# Altium PCB BMS_Slave_8S V0.1.PcbDoc (part 2 of 2)
Units mm, origin at the board's own origin, x right, y up, seen from the top; angles counter-clockwise.
Board outline 54 x 106.3 mm, 2 copper layers (Top Layer, Bottom Layer); 166 components, 124 nets, 443 pads, 56 vias.
Unrouted connection lines stored in the file: 225.
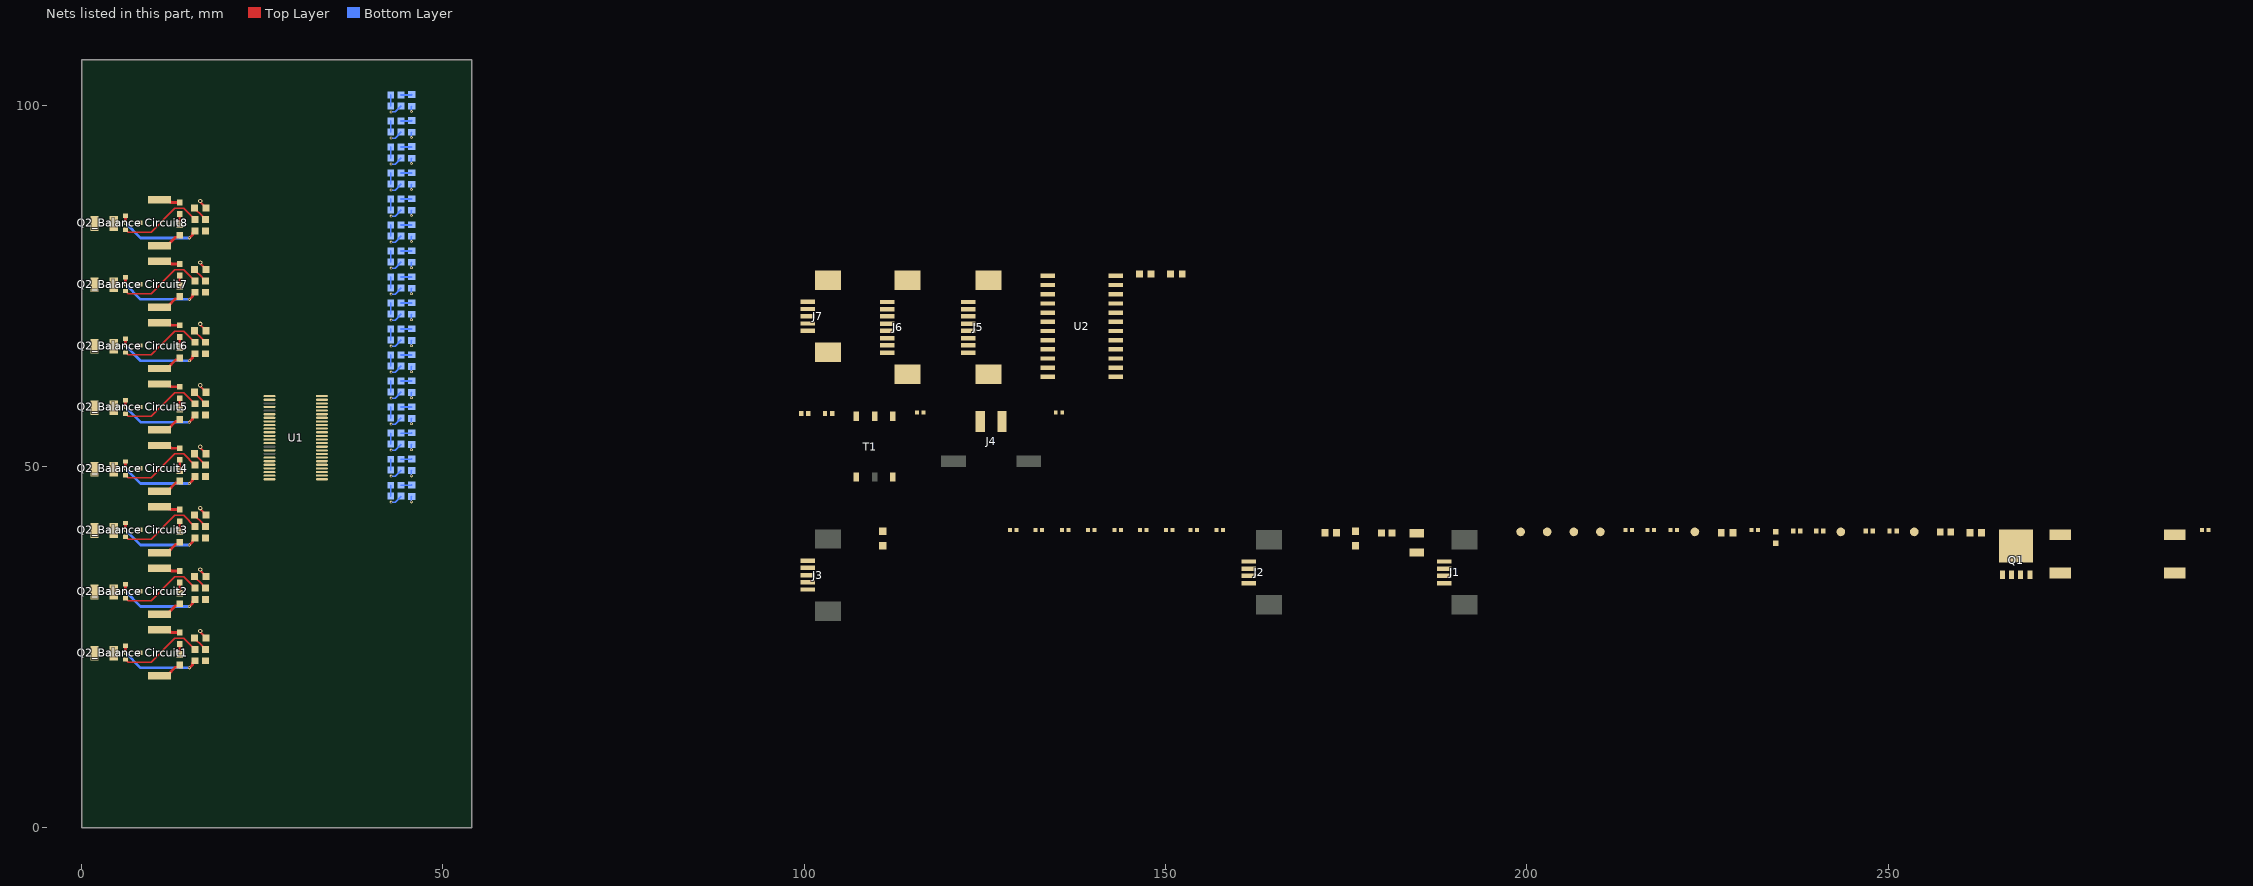
[diagram p2: the nets of this part, all layers, seen from the top]

## Part data
C1 C6: library part Capacitor, "Capacitor", Voltage=>60V, ComponentLink1Description="New link"
C2 C3 C4 C5 C8 C9 C10 C11 "C13_NTC Sense1" "C13_NTC Sense2" "C13_NTC Sense3" "C13_NTC Sense4" "C13_NTC Sense5" "C13_NTC Sense6" "C13_NTC Sense7" "C13_NTC Sense8" "C13_NTC Sense9" "C13_NTC Sense10" "C13_NTC Sense11" "C13_NTC Sense12" "C13_NTC Sense13" "C13_NTC Sense14" "C13_NTC Sense15" "C13_NTC Sense16": library part Capacitor, "Capacitor", ComponentLink1Description="New link"
C7: library part Capacitor, "Capacitor", Voltage=<50.4V, ComponentLink1Description="New link"
"C12_Balance Circuit1" "C12_Balance Circuit2" "C12_Balance Circuit3" "C12_Balance Circuit4" "C12_Balance Circuit5" "C12_Balance Circuit6" "C12_Balance Circuit7" "C12_Balance Circuit8": library part Capacitor, "Capacitor", Voltage=>50.4V, ComponentLink1Description="New link"
D1: "LED RED DIFFUSED 0603 SMD", Case Code (Imperial)=0603, Case Code (Metric)=1608, Color=Red, Forward Voltage=2V, Manufacturer="Wurth Electronics", Supplier Part Number 1=710-150060SS55040, Test Current=20mA, Case/Package=0603, Category=LEDs, Dominant Wavelength=630nm, Height=0.5mm, Length=1.6mm, Lens Size=0.8mm, Lens Style=Flat, Lens Transparency=Diffused, Luminous Intensity=70mcd, Manufacturer Part Number=150060SS55040, Mount="Surface Mount", Packaging="Tape and Reel", Pricing 1="1=0.18000, 10=0.16800, 50=0.16800, 100=0.15200, 1000=0.12100, 10000=0.10600 (USD)", RoHS=No, RoHS Compliant=No, Stock 1=17006, Supplier 1=Mouser, Viewing Angle=140°, Width=0.8mm
"D2_Balance Circuit1" "D2_Balance Circuit2" "D2_Balance Circuit3" "D2_Balance Circuit4" "D2_Balance Circuit5" "D2_Balance Circuit6" "D2_Balance Circuit7" "D2_Balance Circuit8": "LED BLUE DIFFUSED 0603 SMD", Case/Package=0603, Color=Blue, Forward Voltage=3.2V, Manufacturer="Wurth Electronics", Supplier Part Number 1=710-150060BS55040, Test Current=20mA, ComponentLink1Description=http://www.farnell.com/datasheets/2621640.pdf?src-supplier=Farnell, ComponentLink1URL=http://www.farnell.com/datasheets/2621640.pdf?src-supplier=Farnell, ComponentLink2Description=https://www.we-online.de/web/en/index.php/download/media/07_electronic_components/download_center_1/application_notes_berichte/ano002_leds___the_future_of_horticultural_lighting/ANO002b_EN_LEDs_The_Future_of_Horticultural_Lighting.pdf?src-supplier=Digi-Key, ComponentLink2URL=https://www.we-online.de/web/en/index.php/download/media/07_electronic_components/download_center_1/application_notes_berichte/ano002_leds___the_future_of_horticultural_lighting/ANO002b_EN_LEDs_The_Future_of_Horticultural_Lighting.pdf?src-supplier=Digi-Key, ComponentLink3Description=https://katalog.we-online.de/pbs/datasheet/150060BS55040.pdf?src-supplier=Digi-Key, ComponentLink3URL=https://katalog.we-online.de/pbs/datasheet/150060BS55040.pdf?src-supplier=Digi-Key, ComponentLink4Description=http://www.farnell.com/datasheets/2621640.pdf?src-supplier=Newark, ComponentLink4URL=http://www.farnell.com/datasheets/2621640.pdf?src-supplier=Newark, Dominant Wavelength=470nm, Height=0.5mm, Length=1.6mm, Lens Size=0.8mm, Lens Style=Flat, Lens Transparency=Diffused, Luminous Intensity=80mcd, Manufacturer Part Number=150060BS55040, Mount="Surface Mount", Packaging="Tape and Reel", Pricing 1="1=0.18000, 10=0.16800, 50=0.16800, 100=0.15200, 1000=0.12100, 10000=0.10600 (USD)", RoHS=No, RoHS Compliant=No, Supplier 1=Mouser, Viewing Angle=140°, Width=0.8mm
F1 "F2_Balance Circuit1" "F2_Balance Circuit2" "F2_Balance Circuit3" "F2_Balance Circuit4" "F2_Balance Circuit5" "F2_Balance Circuit6" "F2_Balance Circuit7" "F2_Balance Circuit8": library part "Fuse 2", "LITTELFUSE - 0466.500NR - Fuse, Surface Mount, 500 mA, 466 Series, 63 VAC, 63 VDC, Very Fast Acting, 1206", Case Code (Imperial)=1206, Case Code (Metric)=3216, Current Rating=500mA, DC Cold Resistance=248mR, Manufacturer=Littelfuse, Max Operating Temperature=90°C, Min Operating Temperature=-55°C, Package Quantity=5000, Resistance=350mR, Supplier Part Number 1=576-0466.500NR, Voltage Rating=63V, Approvals=UL,CSA, Body Material=Thermoplastic, Case/Package=1206, Category=Fuses, ComponentLink1Description=https://datasheet.ciiva.com/17081/0466-500nr-17081083.pdf?src-supplier=Allied+Electronics, ComponentLink1URL=https://datasheet.ciiva.com/17081/0466-500nr-17081083.pdf?src-supplier=Allied+Electronics, ComponentLink2Description=https://datasheet.ciiva.com/16327/littelfuse-fuse-466-16327478.pdf?src-supplier=Future+Electronics, ComponentLink2URL=https://datasheet.ciiva.com/16327/littelfuse-fuse-466-16327478.pdf?src-supplier=Future+Electronics, ComponentLink3Description=https://datasheet.ciiva.com/299/466seriesdrawing-299207.pdf?src-supplier=Digi-Key, ComponentLink3URL=https://datasheet.ciiva.com/299/466seriesdrawing-299207.pdf?src-supplier=Digi-Key, ComponentLink4Description=https://datasheet.ciiva.com/299/466seriesdrawing-299208.pdf?src-supplier=Digi-Key, ComponentLink4URL=https://datasheet.ciiva.com/299/466seriesdrawing-299208.pdf?src-supplier=Digi-Key, ComponentLink5Description=https://datasheet.ciiva.com/299/466seriesdrawing-299209.pdf?src-supplier=Digi-Key, ComponentLink5URL=https://datasheet.ciiva.com/299/466seriesdrawing-299209.pdf?src-supplier=Digi-Key, ComponentLink6Description=https://datasheet.ciiva.com/14102/ei466-dat-e-14102891.pdf?src-supplier=Distrelec, ComponentLink6URL=https://datasheet.ciiva.com/14102/ei466-dat-e-14102891.pdf?src-supplier=Distrelec, ComponentLink7Description=https://datasheet.ciiva.com/15186/getdatasheetpartid-57351-15186924.pdf?src-supplier=Verical, ComponentLink7URL=https://datasheet.ciiva.com/15186/getdatasheetpartid-57351-15186924.pdf?src-supplier=Verical, Depth=1.52mm, Fuse Current=500mA, Fuse Type="Board Mount (Cartridge Style Excluded)", Height=0.023inch, Housing Material=Ceramic, LatestRevisionDate=17-Jul-2002, LatestRevisionNote="Re-released for DXP Platform.", Lead Free="Lead Free", Length=3.18mm, Manufacturer Part Number=0466.500NR, Mount="Surface Mount", Number of Pins=2, PackageDescription="Thru-Hole; 2 Leads", PackageReference=PIN-W2/E2.8, Packaging="Tape and Reel", Pricing 1="1=0.77000, 10=0.59200, 50=0.59200, 100=0.48900, 1000=0.41600, 10000=0.39000 (USD)", Published=8-Jun-2000, Publisher="Altium Limited", Radiation Hardening=No, REACH SVHC=Unknown, RoHS=Yes, RoHS Compliant=Yes, Series=466, Stock 1=36497, Supplier 1=Mouser, Terminal Material=Copper, Termination=SMD/SMT, Voltage Rating (AC)=63V, Voltage Rating (DC)=63V, Width=0.06inch, Working Voltage=63V
J1 J2: "FPC Connectors, Flex-to-Board, 4 Position, .039 in [1 mm] Centerline, Zero Insertion Force (ZIF), Right Angle, Surface Mount", Package=None, Availability=Unavailable, MF="{'manufacturer': u'TE Connectivity'}", MP=84953-4, Price=None
J3 J7: "FPC Connectors, Flex-to-Board, 5 Position, .039 in [1 mm] Centerline, Zero Insertion Force (ZIF), Right Angle, Surface Mount."
J4: "CONN HEADER 3MM 2POS R/A TIN SMD", Package=None, Availability=Unavailable, MF="{'manufacturer': u'TE Connectivity'}", MP=2-1445057-2, Price=None
J5 J6: "FPC Connectors, Flex-to-Board, 8 Position, .039 in [1 mm] Centerline, Zero Insertion Force (ZIF), Right Angle, Surface Mount", Color=Natural, Contact Current Rating=1A, Flammability Rating="UL94 V-0", Manufacturer="TE Connectivity", Max Operating Temperature=85°C, Min Operating Temperature=-40°C, Package Quantity=1500, Supplier Part Number 1=5351707P, Voltage Rating=200V, Body Plating=Tin, Category="FFC / FPC", ComponentLink1Description=https://datasheet.ciiva.com/11745/0900766b806b36e9-11745458.pdf?src-supplier=RSComponents, ComponentLink1URL=https://datasheet.ciiva.com/11745/0900766b806b36e9-11745458.pdf?src-supplier=RSComponents, ComponentLink2Description=https://datasheet.ciiva.com/669/eng-cd-84953-a3-669123.pdf?src-supplier=Digi-Key, ComponentLink2URL=https://datasheet.ciiva.com/669/eng-cd-84953-a3-669123.pdf?src-supplier=Digi-Key, ComponentLink3Description=https://datasheet.ciiva.com/669/eng-cd-84953-a3-669124.pdf?src-supplier=Digi-Key, ComponentLink3URL=https://datasheet.ciiva.com/669/eng-cd-84953-a3-669124.pdf?src-supplier=Digi-Key, ComponentLink4Description=https://datasheet.ciiva.com/14483/eng-ds-1-1773440-6-0506-14483319.pdf?src-supplier=Farnell, ComponentLink4URL=https://datasheet.ciiva.com/14483/eng-ds-1-1773440-6-0506-14483319.pdf?src-supplier=Farnell, ComponentLink5Description=https://datasheet.ciiva.com/26825/getdatasheetpartid-473787-26825575.pdf?src-supplier=Verical, ComponentLink5URL=https://datasheet.ciiva.com/26825/getdatasheetpartid-473787-26825575.pdf?src-supplier=Verical, ComponentLink6Description=https://datasheet.ciiva.com/8066/586796-8066664.pdf?src-supplier=Element14, ComponentLink6URL=https://datasheet.ciiva.com/8066/586796-8066664.pdf?src-supplier=Element14, ComponentLink7Description=https://datasheet.ciiva.com/669/eng-cd-84953-a3-669122.pdf?src-supplier=Digi-Key, ComponentLink7URL=https://datasheet.ciiva.com/669/eng-cd-84953-a3-669122.pdf?src-supplier=Digi-Key, ComponentLink8Description=https://datasheet.ciiva.com/16658/eng-ds-1-1773440-6-0506-16658613.pdf?src-supplier=Avnet+Europe, ComponentLink8URL=https://datasheet.ciiva.com/16658/eng-ds-1-1773440-6-0506-16658613.pdf?src-supplier=Avnet+Europe, ComponentLink9Description=https://datasheet.ciiva.com/8066/586796-8066666.pdf?src-supplier=Element14, ComponentLink9URL=https://datasheet.ciiva.com/8066/586796-8066666.pdf?src-supplier=Element14, ComponentLink10Description=https://datasheet.ciiva.com/30100/eng-ds-1-1773440-6-0506-30100492.pdf?src-supplier=Onlinecomponents.com, ComponentLink10URL=https://datasheet.ciiva.com/30100/eng-ds-1-1773440-6-0506-30100492.pdf?src-supplier=Onlinecomponents.com, ComponentLink11Description=https://datasheet.ciiva.com/10034/eng-ds-1-1773440-6-0506-10034351.pdf?src-supplier=Avnet, ComponentLink11URL=https://datasheet.ciiva.com/10034/eng-ds-1-1773440-6-0506-10034351.pdf?src-supplier=Avnet, Connector System=Flex-to-Board, Connector Type=Receptacle,Connector,Socket, Contact Location=Top, Contact Material=Bronze, Contact Plating=Tin,Bright, Current Rating=1A, Depth=2.56mm, Gender=Female, Height=2.56mm, Housing Color=Natural, Housing Material=Polymer, Lead Pitch=1mm, Length=0.6268inch, Manufacturer Part Number=84953-8, Material=Thermoplastic, Mating Alignment="Yes (With)", Mount="Surface Mount", Number of Contacts=8, Number of Positions=8, Number of Rows=1, Orientation="Right Angle", Packaging="Tape and Reel", PCB Mount Alignment="No (Without)", PCB Mount Retention=With, PCB Mounting Orientation="Right Angle", Pitch=0.039inch, Plating Thickness=2um, Pricing 1="10=0.83500, 200=0.65000, 750=0.58600, 3000=0.55400, 6000=0.54000 (USD)", Radiation Hardening=No, REACH SVHC="No SVHC", RoHS=Yes, Sealable="No (Without)", Shielding=Unshielded, Shrouded="Yes (With)", Stock 1=1, Supplier 1=RSComponents, Termination=SMD/SMT, Width=0.2575inch, Wire/Cable Type="Flat Flex"
Q1: "60V, 3 A NPN high power bipolar transistor"
"Q2_Balance Circuit1" "Q2_Balance Circuit2" "Q2_Balance Circuit3" "Q2_Balance Circuit4" "Q2_Balance Circuit5" "Q2_Balance Circuit6" "Q2_Balance Circuit7" "Q2_Balance Circuit8": library part CMP-14409-000018-1, "MOSFET P-CH 20V 2A TO-236AB"
T1: "BMS XFORMER 1-CH 1000V AECQ +125", Inductance=150uH, Manufacturer=Bourns, Max Operating Temperature=125°C, Min Operating Temperature=-40°C, Supplier Part Number 1=1802382, Category=Transformers, ComponentLink1Description=https://www.bourns.com/docs/Product-Datasheets/SM91502AL.pdf?src-supplier=Digi-Key, ComponentLink1URL=https://www.bourns.com/docs/Product-Datasheets/SM91502AL.pdf?src-supplier=Digi-Key, Manufacturer Part Number=SM91502ALE, Mount="Surface Mount", Packaging="Cut Tape", Pricing 1="800=2.35100 (USD)", RoHS=Yes, Stock 1=1, Supplier 1=RSComponents, Turns Ratio=1:1
TP1 TP2 TP3 TP4 TP5 TP6 TP7: library part "Test Point", "1.2mm Test point"
U1: "12 Channel Multicell Battery Monitor with Addressable Interface"
U2: "High-Speed CMOS Logic / 16-Channel Analog Multiplexer/Demultiplexer"

## Via types
v1: diameter 0.4, hole 0.2, Top Layer to Bottom Layer, tented both sides, 40 vias
v2: diameter 0.6, hole 0.3, Top Layer to Bottom Layer, tented both sides, 16 vias

## Nets (pads, with @x,y where several pads share a name; then routed paths per layer and width w, separated by ;. In a path a pad name is that pad's centre, name@x,y a point inside that pad or via, vN(x,y) a via of type N, cw(c..) or ccw(c..) an arc to the next point about the centre after c; other vN are vias at no path point)
5V0: C6.2 C10.1 C11.2 Q1.1 Q1.2 Q1.3 R2.2 R4.2 R5.2 R10.2 R11.2 R12.2 R13.2 R18.2 TP3.1 U1.37 U2.24
A0: R10.1 R14.2 U1.45
A1: R11.1 R15.2 U1.46
A2: R12.1 R16.2 U1.47
A3: R13.1 R17.2 U1.48
B1: "R23_Balance Circuit1.1" "R24_Balance Circuit1.1" NT1.2 | length 3.4
  Top Layer w0.381: 10.769,21.05 11.849,21.05 13.014,22.215 13.29,22.215 13.575,22.5
B2: "F2_Balance Circuit1.2" "Q2_Balance Circuit1.2" "R21_Balance Circuit1.1" "R23_Balance Circuit2.1" "R24_Balance Circuit2.1" | length 15.8
  Top Layer w0.203: 6.075,23.275 6.425,22.925 9.625,22.925 12.925,26.225 14.125,26.225 15.675,24.675
  Top Layer w0.381: 10.769,29.55 11.849,29.55 13.014,30.715 ; 13.014,30.715 13.29,30.715 ; 13.014,30.715 13.29,30.715 ; 13.29,30.715 13.575,31 13.29,30.715
B3: "F2_Balance Circuit2.2" "Q2_Balance Circuit2.2" "R21_Balance Circuit2.1" "R23_Balance Circuit3.1" "R24_Balance Circuit3.1" | length 15.8
  Top Layer w0.203: 6.075,31.775 6.425,31.425 9.625,31.425 12.925,34.725 14.125,34.725 15.675,33.175
  Top Layer w0.381: 10.769,38.05 11.849,38.05 13.014,39.215 ; 13.014,39.215 13.29,39.215 ; 13.014,39.215 13.29,39.215 ; 13.29,39.215 13.575,39.5 13.29,39.215
B4: "F2_Balance Circuit3.2" "Q2_Balance Circuit3.2" "R21_Balance Circuit3.1" "R23_Balance Circuit4.1" "R24_Balance Circuit4.1" | length 15.8
  Top Layer w0.203: 6.075,40.275 6.425,39.925 9.625,39.925 12.925,43.225 14.125,43.225 15.675,41.675
  Top Layer w0.381: 10.769,46.55 11.849,46.55 13.014,47.716 ; 13.014,47.716 13.29,47.716 ; 13.014,47.716 13.29,47.716 ; 13.29,47.716 13.575,48 13.29,47.716
B5: "F2_Balance Circuit4.2" "Q2_Balance Circuit4.2" "R21_Balance Circuit4.1" "R23_Balance Circuit5.1" "R24_Balance Circuit5.1" | length 15.8
  Top Layer w0.203: 6.075,48.775 6.425,48.425 9.625,48.425 12.925,51.725 14.125,51.725 15.675,50.175
  Top Layer w0.381: 10.769,55.05 11.849,55.05 13.014,56.216 ; 13.014,56.216 13.29,56.216 ; 13.014,56.216 13.29,56.216 ; 13.29,56.216 13.575,56.5 13.29,56.216
B6: "F2_Balance Circuit5.2" "Q2_Balance Circuit5.2" "R21_Balance Circuit5.1" "R23_Balance Circuit6.1" "R24_Balance Circuit6.1" | length 15.8
  Top Layer w0.203: 6.075,57.275 6.425,56.925 9.625,56.925 12.925,60.225 14.125,60.225 15.675,58.675
  Top Layer w0.381: 10.769,63.55 11.849,63.55 13.014,64.716 ; 13.014,64.716 13.29,64.716 ; 13.014,64.716 13.29,64.716 ; 13.29,64.716 13.575,65 13.29,64.716
B7: "F2_Balance Circuit6.2" "Q2_Balance Circuit6.2" "R21_Balance Circuit6.1" "R23_Balance Circuit7.1" "R24_Balance Circuit7.1" | length 15.8
  Top Layer w0.203: 6.075,65.775 6.425,65.425 9.625,65.425 12.925,68.725 14.125,68.725 15.675,67.175
  Top Layer w0.381: 10.769,72.05 11.849,72.05 13.014,73.216 ; 13.014,73.216 13.29,73.216 ; 13.014,73.216 13.29,73.216 ; 13.29,73.216 13.575,73.5 13.29,73.216
B8: "F2_Balance Circuit7.2" "Q2_Balance Circuit7.2" "R21_Balance Circuit7.1" "R23_Balance Circuit8.1" "R24_Balance Circuit8.1" | length 15.8
  Top Layer w0.203: 6.075,74.275 6.425,73.925 9.625,73.925 12.925,77.225 14.125,77.225 15.675,75.675
  Top Layer w0.381: 10.769,80.55 11.849,80.55 13.014,81.716 ; 13.014,81.716 13.29,81.716 ; 13.014,81.716 13.29,81.716 ; 13.29,81.716 13.575,82 13.29,81.716
C0: C7.2 R9.2 U1.26
C1: "C12_Balance Circuit1.2" "R21_Balance Circuit1.2" U1.24 | length 1.7
  Top Layer w0.254: 15.619,26.263 15.619,26.238 16.752,25.105 16.752,25.048
C2: "C12_Balance Circuit2.2" "R21_Balance Circuit2.2" U1.22 | length 1.7
  Top Layer w0.254: 15.619,34.763 15.619,34.738 16.752,33.605 16.752,33.548
C3: "C12_Balance Circuit3.2" "R21_Balance Circuit3.2" U1.20 | length 1.7
  Top Layer w0.254: 15.619,43.263 15.619,43.238 16.752,42.105 16.752,42.048
C4: "C12_Balance Circuit4.2" "R21_Balance Circuit4.2" U1.14 U1.16 U1.18 | length 1.7
  Top Layer w0.254: 15.619,51.763 15.619,51.738 16.752,50.605 16.752,50.548
C5: "C12_Balance Circuit5.2" "R21_Balance Circuit5.2" U1.12 | length 1.7
  Top Layer w0.254: 15.619,60.263 15.619,60.238 16.752,59.105 16.752,59.048
C6: "C12_Balance Circuit6.2" "R21_Balance Circuit6.2" U1.10 | length 1.7
  Top Layer w0.254: 15.619,68.763 15.619,68.738 16.752,67.605 16.752,67.548
C7: "C12_Balance Circuit7.2" "R21_Balance Circuit7.2" U1.8 | length 1.7
  Top Layer w0.254: 15.619,77.263 15.619,77.238 16.752,76.105 16.752,76.048
C8: "C12_Balance Circuit8.2" "R21_Balance Circuit8.2" U1.2 U1.4 U1.6 | length 1.7
  Top Layer w0.254: 15.619,85.763 15.619,85.738 16.752,84.605 16.752,84.548
Drive: Q1.4 U1.38
GND: "C12_Balance Circuit1.1" "C12_Balance Circuit2.1" "C12_Balance Circuit3.1" "C12_Balance Circuit4.1" "C12_Balance Circuit5.1" "C12_Balance Circuit6.1" "C12_Balance Circuit7.1" "C12_Balance Circuit8.1" "C13_NTC Sense1.1" "C13_NTC Sense2.1" "C13_NTC Sense3.1" "C13_NTC Sense4.1" "C13_NTC Sense5.1" "C13_NTC Sense6.1" "C13_NTC Sense7.1" "C13_NTC Sense8.1" "C13_NTC Sense9.1" "C13_NTC Sense10.1" "C13_NTC Sense11.1" "C13_NTC Sense12.1" "C13_NTC Sense13.1" "C13_NTC Sense14.1" "C13_NTC Sense15.1" "C13_NTC Sense16.1" C1.1 C2.1 C3.1 C4.1 C5.1 C6.1 C7.1 C8.1 C9.1 C10.2 C11.1 D1.1 F1.2 J5.6 J5.7 J5.8 J5.S1 J5.S2 J6.8 J6.S1 J6.S2 J7.5 J7.S1 J7.S2 NT1.1 R6.1 R7.2 R9.1 R14.1 R15.1 R16.1 R17.1 U1.30 U1.31 U2.12 U2.15 | length 22.7
  Top Layer w0.305: v2(16.425,27.225) 16.481,27.169 16.481,27.026 17.219,26.288 17.219,26.263 ; v2(16.425,35.725) 16.481,35.669 16.481,35.526 17.219,34.788 17.219,34.763 ; v2(16.425,44.225) 16.481,44.169 16.481,44.026 17.219,43.288 17.219,43.263 ; v2(16.425,52.725) 16.481,52.669 16.481,52.526 17.219,51.788 17.219,51.763 ; v2(16.425,61.225) 16.481,61.169 16.481,61.026 17.219,60.288 17.219,60.263 ; v2(16.425,69.725) 16.481,69.669 16.481,69.526 17.219,68.788 17.219,68.763 ; v2(16.425,78.225) 16.481,78.169 16.481,78.026 17.219,77.288 17.219,77.263 ; v2(16.425,86.725) 16.481,86.669 16.481,86.526 17.219,85.788 17.219,85.763
  Bottom Layer w0.203: v1(45.65,45.1) 45.65,45.8 45.7,45.85 ; v1(45.65,48.7) 45.65,49.4 45.7,49.45 ; v1(45.65,52.3) 45.65,53 45.7,53.05 ; v1(45.65,55.9) 45.65,56.6 45.7,56.65 ; v1(45.65,59.5) 45.65,60.2 45.7,60.25 ; v1(45.65,63.1) 45.65,63.8 45.7,63.85 ; v1(45.65,66.7) 45.65,67.4 45.7,67.45 ; v1(45.65,70.3) 45.65,71 45.7,71.05 ; v1(45.65,73.9) 45.65,74.6 45.7,74.65 ; v1(45.65,77.5) 45.65,78.2 45.7,78.25 ; v1(45.65,81.1) 45.65,81.8 45.7,81.85 ; v1(45.65,84.7) 45.65,85.4 45.7,85.45 ; v1(45.65,88.3) 45.65,89 45.7,89.05 ; v1(45.65,91.9) 45.65,92.6 45.7,92.65 ; v1(45.65,95.5) 45.65,96.2 45.7,96.25 ; v1(45.65,99.1) 45.65,99.8 45.7,99.85
GPIO.1: U1.27 U2.10
GPIO.2: U1.28 U2.11
GPIO.3: U1.29 U2.14
GPIO.4: U1.32 U2.13
IBIAS: R8.1 TP4.1 U1.44
ICMP: R7.1 R8.2 TP5.1 U1.43
ISOMD: R18.1 U1.40
isoSPI._N: R20.2 T1.4 TP7.1 U1.41
isoSPI._P: R19.2 T1.6 TP6.1 U1.42
NetC1_2: C1.2 Q1.5 R1.1
NetC8_2: C8.2 R19.1 R20.1
NetC9_2: C9.2 T1.5
NetD1_2: D1.2 R4.1
"NetD2_Balance Circuit1_1": "D2_Balance Circuit1.1" "R24_Balance Circuit1.2" | length 1.5
  Top Layer w0.381: 13.575,23.95 13.575,25.425
"NetD2_Balance Circuit1_2": "D2_Balance Circuit1.2" "Q2_Balance Circuit1.3" "R23_Balance Circuit1.2" | length 3
  Top Layer w0.381: 10.769,27.4 11.849,27.4 12.168,27.08 12.336,27.08 12.392,27.025 13.575,27.025
"NetD2_Balance Circuit2_1": "D2_Balance Circuit2.1" "R24_Balance Circuit2.2" | length 1.5
  Top Layer w0.381: 13.575,32.45 13.575,33.925
"NetD2_Balance Circuit2_2": "D2_Balance Circuit2.2" "Q2_Balance Circuit2.3" "R23_Balance Circuit2.2" | length 3
  Top Layer w0.381: 10.769,35.9 11.849,35.9 12.168,35.58 12.336,35.58 12.392,35.525 13.575,35.525
"NetD2_Balance Circuit3_1": "D2_Balance Circuit3.1" "R24_Balance Circuit3.2" | length 1.5
  Top Layer w0.381: 13.575,40.95 13.575,42.425
"NetD2_Balance Circuit3_2": "D2_Balance Circuit3.2" "Q2_Balance Circuit3.3" "R23_Balance Circuit3.2" | length 3
  Top Layer w0.381: 10.769,44.4 11.849,44.4 12.168,44.08 12.336,44.08 12.392,44.025 13.575,44.025
"NetD2_Balance Circuit4_1": "D2_Balance Circuit4.1" "R24_Balance Circuit4.2" | length 1.5
  Top Layer w0.381: 13.575,49.45 13.575,50.925
"NetD2_Balance Circuit4_2": "D2_Balance Circuit4.2" "Q2_Balance Circuit4.3" "R23_Balance Circuit4.2" | length 3
  Top Layer w0.381: 10.769,52.9 11.849,52.9 12.168,52.58 12.336,52.58 12.392,52.525 13.575,52.525
"NetD2_Balance Circuit5_1": "D2_Balance Circuit5.1" "R24_Balance Circuit5.2" | length 1.5
  Top Layer w0.381: 13.575,57.95 13.575,59.425
"NetD2_Balance Circuit5_2": "D2_Balance Circuit5.2" "Q2_Balance Circuit5.3" "R23_Balance Circuit5.2" | length 3
  Top Layer w0.381: 10.769,61.4 11.849,61.4 12.168,61.08 12.336,61.08 12.392,61.025 13.575,61.025
"NetD2_Balance Circuit6_1": "D2_Balance Circuit6.1" "R24_Balance Circuit6.2" | length 1.5
  Top Layer w0.381: 13.575,66.45 13.575,67.925
"NetD2_Balance Circuit6_2": "D2_Balance Circuit6.2" "Q2_Balance Circuit6.3" "R23_Balance Circuit6.2" | length 3
  Top Layer w0.381: 10.769,69.9 11.849,69.9 12.168,69.58 12.336,69.58 12.392,69.525 13.575,69.525
"NetD2_Balance Circuit7_1": "D2_Balance Circuit7.1" "R24_Balance Circuit7.2" | length 1.5
  Top Layer w0.381: 13.575,74.95 13.575,76.425
"NetD2_Balance Circuit7_2": "D2_Balance Circuit7.2" "Q2_Balance Circuit7.3" "R23_Balance Circuit7.2" | length 3
  Top Layer w0.381: 10.769,78.4 11.849,78.4 12.168,78.08 12.336,78.08 12.392,78.025 13.575,78.025
"NetD2_Balance Circuit8_1": "D2_Balance Circuit8.1" "R24_Balance Circuit8.2" | length 1.5
  Top Layer w0.381: 13.575,83.45 13.575,84.925
"NetD2_Balance Circuit8_2": "D2_Balance Circuit8.2" "Q2_Balance Circuit8.3" "R23_Balance Circuit8.2" | length 3
  Top Layer w0.381: 10.769,86.9 11.849,86.9 12.168,86.58 12.336,86.58 12.392,86.525 13.575,86.525
"NetQ2_Balance Circuit1_1": "Q2_Balance Circuit1.1" "R22_Balance Circuit1.1" | length 21.6
  Top Layer w0.381: v2(6.075,24.225) 6.075,25.175 ; v1(14.925,22.125) 15.334,22.534 15.334,22.759 15.675,23.1
  Bottom Layer w0.381: 8.175,22.125 v2(6.075,24.225) 8.175,22.125 ; 8.175,22.125 14.868,22.125 8.175,22.125
"NetQ2_Balance Circuit2_1": "Q2_Balance Circuit2.1" "R22_Balance Circuit2.1" | length 21.6
  Top Layer w0.381: v2(6.075,32.725) 6.075,33.675 ; v1(14.925,30.625) 15.334,31.034 15.334,31.259 15.675,31.6
  Bottom Layer w0.381: 8.175,30.625 v2(6.075,32.725) 8.175,30.625 ; 8.175,30.625 14.868,30.625 8.175,30.625
"NetQ2_Balance Circuit3_1": "Q2_Balance Circuit3.1" "R22_Balance Circuit3.1" | length 21.6
  Top Layer w0.381: v2(6.075,41.225) 6.075,42.175 ; v1(14.925,39.125) 15.334,39.534 15.334,39.759 15.675,40.1
  Bottom Layer w0.381: 8.175,39.125 v2(6.075,41.225) 8.175,39.125 ; 8.175,39.125 14.868,39.125 8.175,39.125
"NetQ2_Balance Circuit4_1": "Q2_Balance Circuit4.1" "R22_Balance Circuit4.1" | length 21.6
  Top Layer w0.381: v2(6.075,49.725) 6.075,50.675 ; v1(14.925,47.625) 15.334,48.034 15.334,48.259 15.675,48.6
  Bottom Layer w0.381: 8.175,47.625 v2(6.075,49.725) 8.175,47.625 ; 8.175,47.625 14.868,47.625 8.175,47.625
"NetQ2_Balance Circuit5_1": "Q2_Balance Circuit5.1" "R22_Balance Circuit5.1" | length 21.6
  Top Layer w0.381: v2(6.075,58.225) 6.075,59.175 ; v1(14.925,56.125) 15.334,56.534 15.334,56.759 15.675,57.1
  Bottom Layer w0.381: 8.175,56.125 v2(6.075,58.225) 8.175,56.125 ; 8.175,56.125 14.868,56.125 8.175,56.125
"NetQ2_Balance Circuit6_1": "Q2_Balance Circuit6.1" "R22_Balance Circuit6.1" | length 21.6
  Top Layer w0.381: v2(6.075,66.725) 6.075,67.675 ; v1(14.925,64.625) 15.334,65.034 15.334,65.259 15.675,65.6
  Bottom Layer w0.381: 8.175,64.625 v2(6.075,66.725) 8.175,64.625 ; 8.175,64.625 14.868,64.625 8.175,64.625
"NetQ2_Balance Circuit7_1": "Q2_Balance Circuit7.1" "R22_Balance Circuit7.1" | length 21.6
  Top Layer w0.381: v2(6.075,75.225) 6.075,76.175 ; v1(14.925,73.125) 15.334,73.534 15.334,73.759 15.675,74.1
  Bottom Layer w0.381: 8.175,73.125 v2(6.075,75.225) 8.175,73.125 ; 8.175,73.125 14.868,73.125 8.175,73.125
"NetQ2_Balance Circuit8_1": "Q2_Balance Circuit8.1" "R22_Balance Circuit8.1" | length 21.6
  Top Layer w0.381: v2(6.075,83.725) 6.075,84.675 ; v1(14.925,81.625) 15.334,82.034 15.334,82.259 15.675,82.6
  Bottom Layer w0.381: 8.175,81.625 v2(6.075,83.725) 8.175,81.625 ; 8.175,81.625 14.868,81.625 8.175,81.625
NetR3_1: R3.1 U1.1
NetR5_1: R5.1 R6.2 U1.36
NetU1_33: U1.33 U2.1
NTC1: "R25_NTC Sense1.1" "R26_NTC Sense1.2" J5.5 | length 1.5
  Bottom Layer w0.254: 42.775,45.9 42.775,47.4
NTC2: "R25_NTC Sense2.1" "R26_NTC Sense2.2" J5.4 | length 1.5
  Bottom Layer w0.254: 42.775,49.5 42.775,51
NTC3: "R25_NTC Sense3.1" "R26_NTC Sense3.2" J5.3 | length 1.5
  Bottom Layer w0.254: 42.775,53.1 42.775,54.6
NTC4: "R25_NTC Sense4.1" "R26_NTC Sense4.2" J5.2 | length 1.5
  Bottom Layer w0.254: 42.775,56.7 42.775,58.2
NTC5: "R25_NTC Sense5.1" "R26_NTC Sense5.2" J5.1 | length 1.5
  Bottom Layer w0.254: 42.775,60.3 42.775,61.8
NTC6: "R25_NTC Sense6.1" "R26_NTC Sense6.2" J6.7 | length 1.5
  Bottom Layer w0.254: 42.775,63.9 42.775,65.4
NTC7: "R25_NTC Sense7.1" "R26_NTC Sense7.2" J6.6 | length 1.5
  Bottom Layer w0.254: 42.775,67.5 42.775,69
NTC8: "R25_NTC Sense8.1" "R26_NTC Sense8.2" J6.5 | length 1.5
  Bottom Layer w0.254: 42.775,71.1 42.775,72.6
NTC9: "R25_NTC Sense9.1" "R26_NTC Sense9.2" J6.4 | length 1.5
  Bottom Layer w0.254: 42.775,74.7 42.775,76.2
NTC10: "R25_NTC Sense10.1" "R26_NTC Sense10.2" J6.3 | length 1.5
  Bottom Layer w0.254: 42.775,78.3 42.775,79.8
NTC11: "R25_NTC Sense11.1" "R26_NTC Sense11.2" J6.2 | length 1.5
  Bottom Layer w0.254: 42.775,81.9 42.775,83.4
NTC12: "R25_NTC Sense12.1" "R26_NTC Sense12.2" J6.1 | length 1.5
  Bottom Layer w0.254: 42.775,85.5 42.775,87
NTC13: "R25_NTC Sense13.1" "R26_NTC Sense13.2" J7.4 | length 1.5
  Bottom Layer w0.254: 42.775,89.1 42.775,90.6
NTC14: "R25_NTC Sense14.1" "R26_NTC Sense14.2" J7.3 | length 1.5
  Bottom Layer w0.254: 42.775,92.7 42.775,94.2
NTC15: "R25_NTC Sense15.1" "R26_NTC Sense15.2" J7.2 | length 1.5
  Bottom Layer w0.254: 42.775,96.3 42.775,97.8
NTC16: "R25_NTC Sense16.1" "R26_NTC Sense16.2" J7.1 | length 1.5
  Bottom Layer w0.254: 42.775,99.9 42.775,101.4
Out1: "C13_NTC Sense1.2" "R26_NTC Sense1.1" U2.9 | length 1.5
  Bottom Layer w0.254: 44.225,47.4 45.65,47.4 45.7,47.45
Out2: "C13_NTC Sense2.2" "R26_NTC Sense2.1" U2.8 | length 1.5
  Bottom Layer w0.254: 44.225,51 45.65,51 45.7,51.05
Out3: "C13_NTC Sense3.2" "R26_NTC Sense3.1" U2.7 | length 1.5
  Bottom Layer w0.254: 44.225,54.6 45.65,54.6 45.7,54.65
Out4: "C13_NTC Sense4.2" "R26_NTC Sense4.1" U2.6 | length 1.5
  Bottom Layer w0.254: 44.225,58.2 45.65,58.2 45.7,58.25
Out5: "C13_NTC Sense5.2" "R26_NTC Sense5.1" U2.5 | length 1.5
  Bottom Layer w0.254: 44.225,61.8 45.65,61.8 45.7,61.85
Out6: "C13_NTC Sense6.2" "R26_NTC Sense6.1" U2.4 | length 1.5
  Bottom Layer w0.254: 44.225,65.4 45.65,65.4 45.7,65.45
Out7: "C13_NTC Sense7.2" "R26_NTC Sense7.1" U2.3 | length 1.5
  Bottom Layer w0.254: 44.225,69 45.65,69 45.7,69.05
Out8: "C13_NTC Sense8.2" "R26_NTC Sense8.1" U2.2 | length 1.5
  Bottom Layer w0.254: 44.225,72.6 45.65,72.6 45.7,72.65
Out9: "C13_NTC Sense9.2" "R26_NTC Sense9.1" U2.23 | length 1.5
  Bottom Layer w0.254: 44.225,76.2 45.65,76.2 45.7,76.25
Out10: "C13_NTC Sense10.2" "R26_NTC Sense10.1" U2.22 | length 1.5
  Bottom Layer w0.254: 44.225,79.8 45.65,79.8 45.7,79.85
Out11: "C13_NTC Sense11.2" "R26_NTC Sense11.1" U2.21 | length 1.5
  Bottom Layer w0.254: 44.225,83.4 45.65,83.4 45.7,83.45
Out12: "C13_NTC Sense12.2" "R26_NTC Sense12.1" U2.20 | length 1.5
  Bottom Layer w0.254: 44.225,87 45.65,87 45.7,87.05
Out13: "C13_NTC Sense13.2" "R26_NTC Sense13.1" U2.19 | length 1.5
  Bottom Layer w0.254: 44.225,90.6 45.65,90.6 45.7,90.65
Out14: "C13_NTC Sense14.2" "R26_NTC Sense14.1" U2.18 | length 1.5
  Bottom Layer w0.254: 44.225,94.2 45.65,94.2 45.7,94.25
Out15: "C13_NTC Sense15.2" "R26_NTC Sense15.1" U2.17 | length 1.5
  Bottom Layer w0.254: 44.225,97.8 45.65,97.8 45.7,97.85
Out16: "C13_NTC Sense16.2" "R26_NTC Sense16.1" U2.16 | length 1.5
  Bottom Layer w0.254: 44.225,101.4 45.65,101.4 45.7,101.45
PORTA_N: J4.1 T1.3
PORTA_P: J4.2 T1.1
S1: "R22_Balance Circuit1.2" U1.25
S2: "R22_Balance Circuit2.2" U1.23
S3: "R22_Balance Circuit3.2" U1.21
S4: "R22_Balance Circuit4.2" U1.19
S5: "R22_Balance Circuit5.2" U1.13
S6: "R22_Balance Circuit6.2" U1.11
S7: "R22_Balance Circuit7.2" U1.9
S8: "R22_Balance Circuit8.2" U1.7
T8: "F2_Balance Circuit8.2" "Q2_Balance Circuit8.2" "R21_Balance Circuit8.1" NT2.1 | length 11.8
  Top Layer w0.203: 6.075,82.775 6.425,82.425 9.625,82.425 12.925,85.725 14.125,85.725 15.675,84.175
VBat: NT2.2 R1.2 R3.2
Vc0: F1.1 J1.4
Vc1: "F2_Balance Circuit1.1" J1.3
Vc2: "F2_Balance Circuit2.1" J1.2
Vc3: "F2_Balance Circuit3.1" J1.1
Vc4: "F2_Balance Circuit4.1" J2.4
Vc5: "F2_Balance Circuit5.1" J2.3
Vc6: "F2_Balance Circuit6.1" J2.2
Vc7: "F2_Balance Circuit7.1" J2.1
Vc8: "F2_Balance Circuit8.1" J3.5
Vc9: J3.4
Vc10: J3.3
Vc11: J3.2
Vc12: J3.1
VREF1: C2.2 C3.2 TP1.1 U1.35
VREF2: "R25_NTC Sense1.2" "R25_NTC Sense2.2" "R25_NTC Sense3.2" "R25_NTC Sense4.2" "R25_NTC Sense5.2" "R25_NTC Sense6.2" "R25_NTC Sense7.2" "R25_NTC Sense8.2" "R25_NTC Sense9.2" "R25_NTC Sense10.2" "R25_NTC Sense11.2" "R25_NTC Sense12.2" "R25_NTC Sense13.2" "R25_NTC Sense14.2" "R25_NTC Sense15.2" "R25_NTC Sense16.2" C4.2 C5.2 TP2.1 U1.34 | length 28
  Bottom Layer w0.203: v1(42.825,45.05) 43.375,45.05 44.225,45.9 ; v1(42.825,48.65) 43.375,48.65 44.225,49.5 ; v1(42.825,52.25) 43.375,52.25 44.225,53.1 ; v1(42.825,55.85) 43.375,55.85 44.225,56.7 ; v1(42.825,59.45) 43.375,59.45 44.225,60.3 ; v1(42.825,63.05) 43.375,63.05 44.225,63.9 ; v1(42.825,66.65) 43.375,66.65 44.225,67.5 ; v1(42.825,70.25) 43.375,70.25 44.225,71.1 ; v1(42.825,73.85) 43.375,73.85 44.225,74.7 ; v1(42.825,77.45) 43.375,77.45 44.225,78.3 ; v1(42.825,81.05) 43.375,81.05 44.225,81.9 ; v1(42.825,84.65) 43.375,84.65 44.225,85.5 ; v1(42.825,88.25) 43.375,88.25 44.225,89.1 ; v1(42.825,91.85) 43.375,91.85 44.225,92.7 ; v1(42.825,95.45) 43.375,95.45 44.225,96.3 ; v1(42.825,99.05) 43.375,99.05 44.225,99.9
WDT: R2.1 U1.39
pads on no net: J1.S1 J1.S2 J2.S1 J2.S2 J3.S1 J3.S2 J4.P1 J4.P2 T1. T1.2 U1.3 U1.5 U1.15 U1.17

## Polygon pours and split planes (outlines as drawn)
T8 on Top Layer (solid, remove dead copper, pour order 16): 3.825,82.425 6.425,82.425 6.425,83.125 6.025,83.125 5.525,83.625 5.525,85.025 8.125,87.625 12.425,87.625 12.425,89.725 6.225,89.725 3.825,87.325 3.825,84.725
B8 on Top Layer (solid, remove dead copper, pour order 15): 3.825,73.925 6.425,73.925 6.425,74.625 6.025,74.625 5.525,75.125 5.525,76.525 8.125,79.125 12.425,79.125 12.425,81.225 6.225,81.225 3.825,78.825 3.825,76.225
B7 on Top Layer (solid, remove dead copper, pour order 14): 3.825,65.425 6.425,65.425 6.425,66.125 6.025,66.125 5.525,66.625 5.525,68.025 8.125,70.625 12.425,70.625 12.425,72.725 6.225,72.725 3.825,70.325 3.825,67.725
B6 on Top Layer (solid, remove dead copper, pour order 13): 3.825,56.925 6.425,56.925 6.425,57.625 6.025,57.625 5.525,58.125 5.525,59.525 8.125,62.125 12.425,62.125 12.425,64.225 6.225,64.225 3.825,61.825 3.825,59.225
B5 on Top Layer (solid, remove dead copper, pour order 12): 3.825,48.425 6.425,48.425 6.425,49.125 6.025,49.125 5.525,49.625 5.525,51.025 8.125,53.625 12.425,53.625 12.425,55.725 6.225,55.725 3.825,53.325 3.825,50.725
B4 on Top Layer (solid, remove dead copper, pour order 11): 3.825,39.925 6.425,39.925 6.425,40.625 6.025,40.625 5.525,41.125 5.525,42.525 8.125,45.125 12.425,45.125 12.425,47.225 6.225,47.225 3.825,44.825 3.825,42.225
B3 on Top Layer (solid, remove dead copper, pour order 10): 3.825,31.425 6.425,31.425 6.425,32.125 6.025,32.125 5.525,32.625 5.525,34.025 8.125,36.625 12.425,36.625 12.425,38.725 6.225,38.725 3.825,36.325 3.825,33.725
"NetD2_Balance Circuit2_2" on Top Layer "NONET_L-01_P-001" (solid, remove dead copper, pour order 4): 7.425,32.325 9.825,32.325 12.425,34.925 12.425,36.625 8.125,36.625 7.425,35.925
"NetD2_Balance Circuit1_2" on Top Layer "NONET_L-01_P-001" (solid, remove dead copper, pour order 4): 7.425,23.825 9.825,23.825 12.425,26.425 12.425,28.125 8.125,28.125 7.425,27.425
"NetD2_Balance Circuit7_2" on Top Layer "NONET_L-01_P-001" (solid, remove dead copper, pour order 4): 7.425,74.825 9.825,74.825 12.425,77.425 12.425,79.125 8.125,79.125 7.425,78.425
"NetD2_Balance Circuit4_2" on Top Layer "NONET_L-01_P-001" (solid, remove dead copper, pour order 4): 7.425,49.325 9.825,49.325 12.425,51.925 12.425,53.625 8.125,53.625 7.425,52.925
"NetD2_Balance Circuit5_2" on Top Layer "NONET_L-01_P-001" (solid, remove dead copper, pour order 4): 7.425,57.825 9.825,57.825 12.425,60.425 12.425,62.125 8.125,62.125 7.425,61.425
"NetD2_Balance Circuit3_2" on Top Layer "NONET_L-01_P-001" (solid, remove dead copper, pour order 4): 7.425,40.825 9.825,40.825 12.425,43.425 12.425,45.125 8.125,45.125 7.425,44.425
"NetD2_Balance Circuit8_2" on Top Layer "NONET_L-01_P-001" (solid, remove dead copper, pour order 4): 7.425,83.325 9.825,83.325 12.425,85.925 12.425,87.625 8.125,87.625 7.425,86.925
"NetD2_Balance Circuit6_2" on Top Layer "NONET_L-01_P-001" (solid, remove dead copper, pour order 4): 7.425,66.325 9.825,66.325 12.425,68.925 12.425,70.625 8.125,70.625 7.425,69.925
B2 on Top Layer (solid, remove dead copper, pour order 9): 3.825,22.925 6.425,22.925 6.425,23.625 6.025,23.625 5.525,24.125 5.525,25.525 8.125,28.125 12.425,28.125 12.425,30.225 6.225,30.225 3.825,27.825 3.825,25.225

## Silkscreen, mask and mechanical layers (free items; w line width, h text height)
Board Shape:
  the board outline again, w0.1